# Altium PCB bms_v2.PcbDoc
Units mil, origin at the board's own origin, x right, y up, seen from the top; angles counter-clockwise.
Board outline 6000 x 4000 mil, 2 copper layers (Top Layer, Bottom Layer); 43 components, 47 nets, 140 pads, 0 vias.
Unrouted connection lines stored in the file: 2.
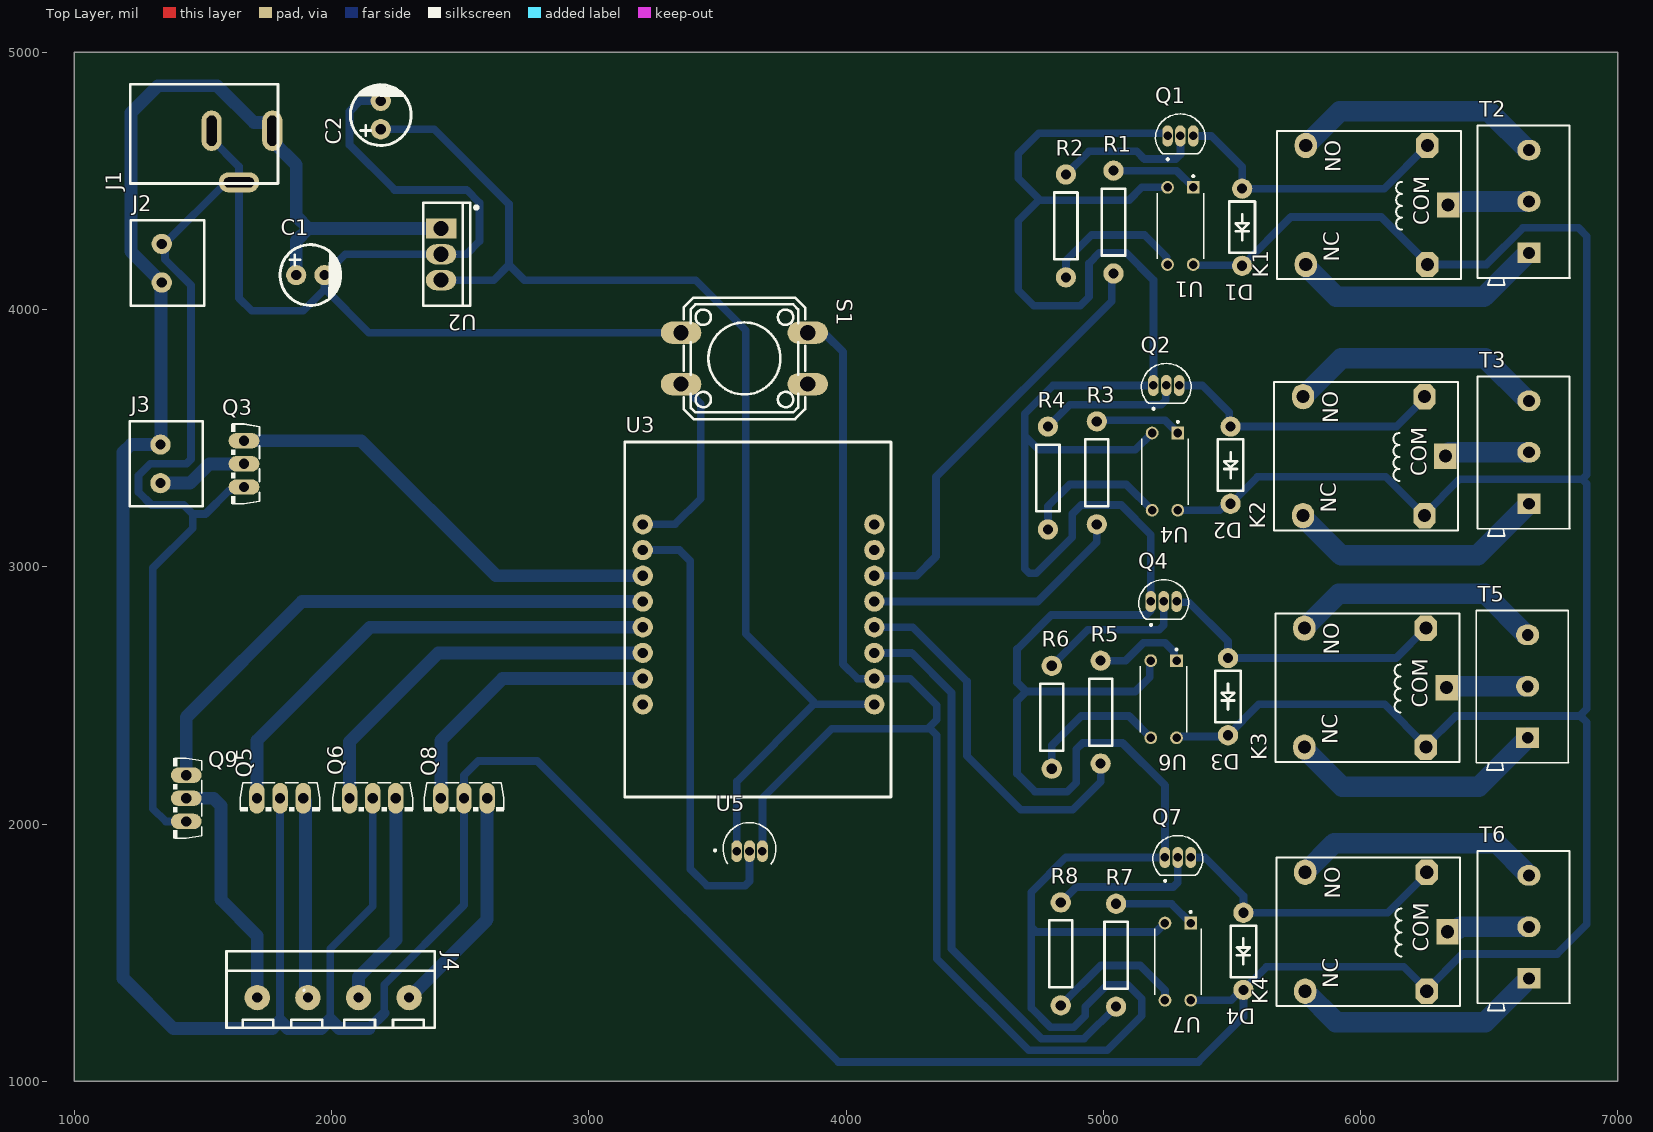
[diagram p0: Top Layer view]
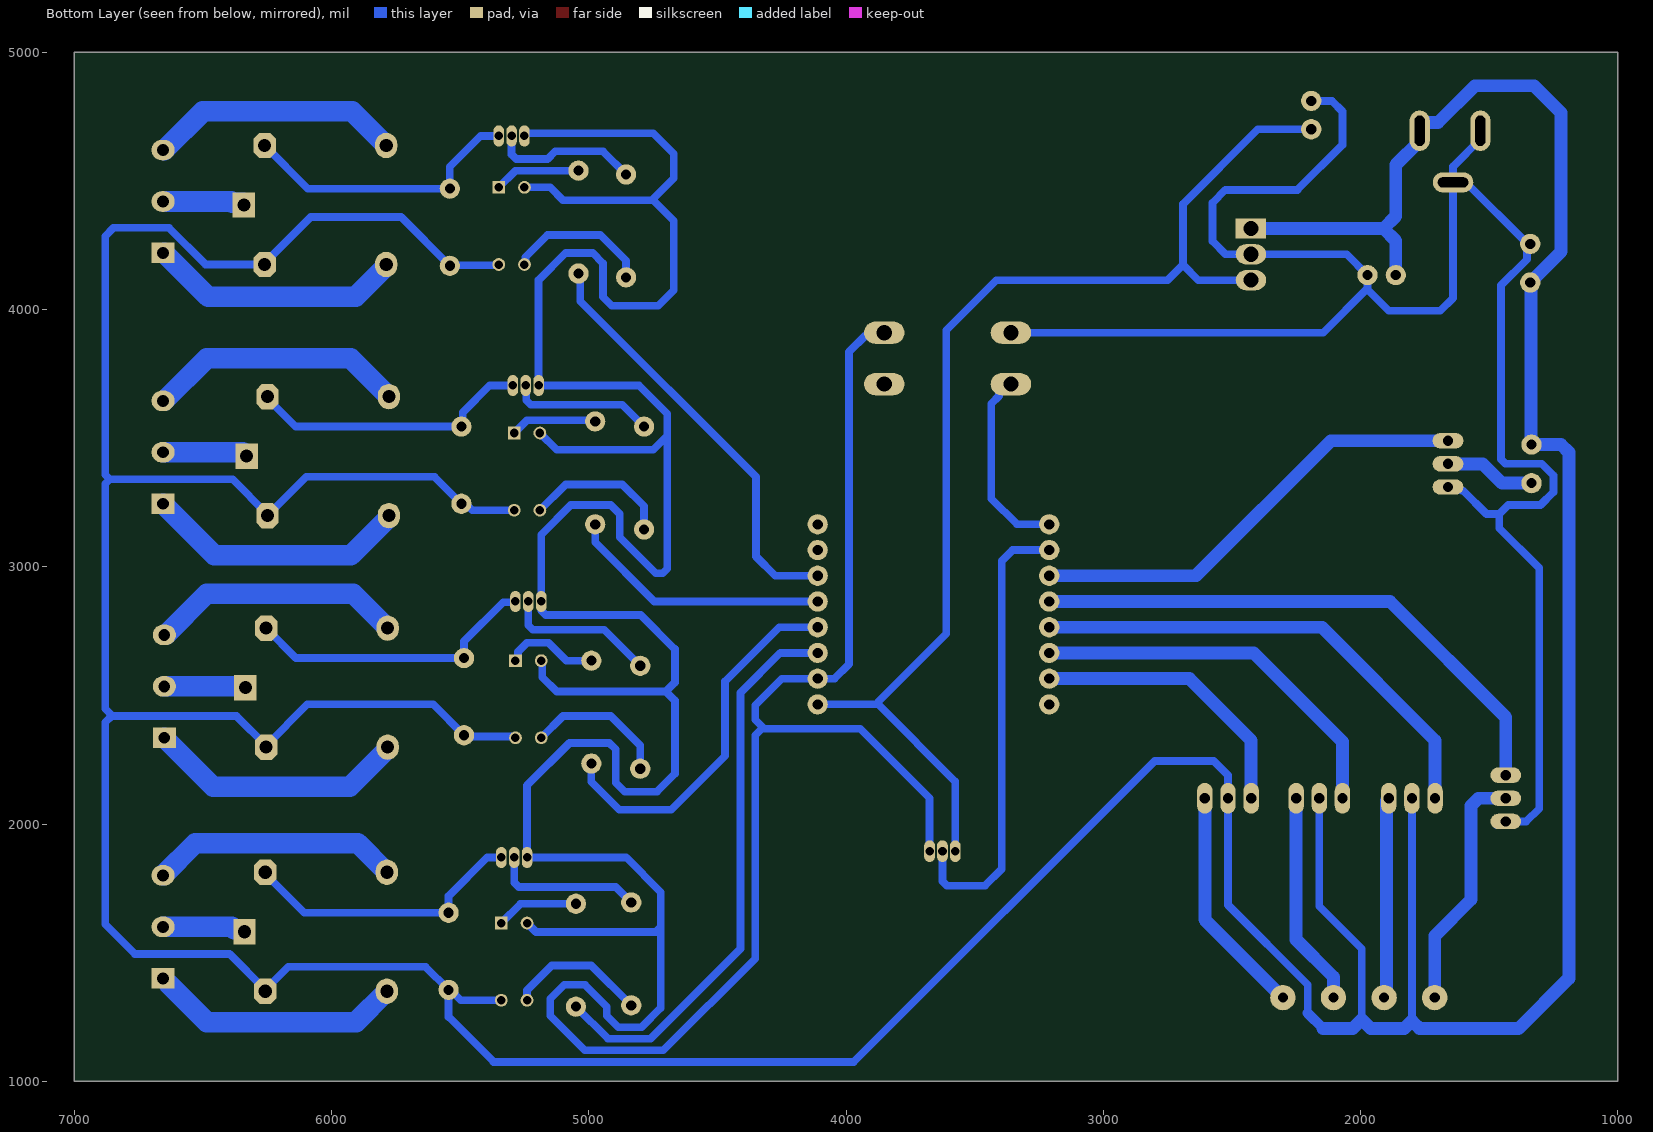
[diagram p1: Bottom Layer view, seen from below]

## Layer stack, top to bottom
Top Solder: solder mask 0.4, Solder Resist, Dk 3.5
Top Layer: signal copper 1.4
Dielectric 1: dielectric 12.6, FR-4, Dk 4.8
Bottom Layer: signal copper 1.4
Bottom Solder: solder mask 0.4, Solder Resist, Dk 3.5

## Board outline
1000,1000 7000,1000 7000,5000 1000,5000

## Design rules (kind name [scope] priority, off if disabled: settings)
Clearance [All] p1: gap=10 ignorepadtopadclearanceinfootprint=FALSE except(0: Arc-Hole Track-Hole SMDPad-Hole THPad-Hole Via-Hole Fill-Hole Poly-Hole Region-Hole Text-Hole)
PolygonConnect [All] p1: connectstyle=Relief reliefconductorwidth=10 reliefentries=4 polygonreliefangle="90 Angle" airgapwidth=10
RoutingVias [All] p1: holewidth=28 width=50 viastyle="Through Hole" minholewidth=28 minwidth=50 maxholewidth=28 maxwidth=50
SolderMaskExpansion [All] p1: expansion=4 istentingtop=FALSE
UnRoutedNet [All] p1: checkbadconnections=TRUE
Width [All] p1: maxlimit=80 minlimit=10 preferedwidth=25
29 further rules are at their usual default settings.

## Components (designator, comment, footprint, x,y, rotation, side; value= is the part's Value field where it differs from the comment)
C1 "100uF/16V" 100uF/16V 1917.64,4134.02 r0 top
C2 "100uF/16V" 100uF/16V 2191.32,4755.9 r90 top
D1 "1N4007" 1N4007 5540,4320 r180 top
D2 "1N4007" 1N4007 5495,3395 r180 top
D3 "1N4007" 1N4007 5485,2495 r180 top
D4 "1N4007" 1N4007 5545,1505 r180 top
J1 "VCC +12" JACK_P4 1504.39,4682.5 r180 top
J2 "15EDGVC-3.81-2P" 15EDGVC-3.81-2P 1360,4180 r0 top
J3 "15EDGVC-3.81-2P" 15EDGVC-3.81-2P 1355,3400 r0 top
J4 "BORNE-5.00-4P" BORNE-5.00-4P 1996.57,1356.4 r270 top
K1 "Relay 18.85x15.35x15.70" "Relay 18.85x15.35x15.70" 9211.97,-469.61 r90 top
K2 "Relay 18.85x15.35x15.70" "Relay 18.85x15.35x15.70" 9201.26,-1445.91 r90 top
K3 "Relay 18.85x15.35x15.70" "Relay 18.85x15.35x15.70" 9206.26,-2345.91 r90 top
K4 "Relay 18.85x15.35x15.70" "Relay 18.85x15.35x15.70" 9209.41,-3294.61 r90 top
Q1 "2N3904" TO92127P495H495-3 5300,4675 r0 top
Q2 "2N3904" TO92127P495H495-3 5245,3705 r0 top
Q3 "BD139" TO126AV 1609.91,3400 r90 top
Q4 "2N3904" TO92127P495H495-3 5235,2865 r0 top
Q5 "BD139" TO126AV 1799.99,2050 r180 top
Q6 "BD139" TO126AV 2159.99,2050 r180 top
Q7 "2N3904" TO92127P495H495-3 5290,1870 r0 top
Q8 "BD139" TO126AV 2514.99,2050 r180 top
Q9 "BD139" TO126AV 1385,2100 r90 top
R1 "220 ohm" RESISTOR_PTH_10mm 5040,4340 r90 top
R2 "510 ohm" RESISTOR_PTH_10mm 4855,4325 r90 top
R3 "220 ohm" RESISTOR_PTH_10mm 4975,3365 r90 top
R4 "510 ohm" RESISTOR_PTH_10mm 4785,3345 r90 top
R5 "220 ohm" RESISTOR_PTH_10mm 4990,2435 r90 top
R6 "510 ohm" RESISTOR_PTH_10mm 4800,2415 r90 top
R7 "220 ohm" RESISTOR_PTH_10mm 5050,1490 r90 top
R8 "510 ohm" RESISTOR_PTH_10mm 4835,1495 r90 top
S1 "PUSH_BUTTON_12X12" PUSH_BUTTON_12X12_BLUE 3605,3810 r0 top
T2 "3Pin_Terminal" 3Pin_Terminal 7805.24,1649.17 r90 top
T3 "3Pin_Terminal" 3Pin_Terminal 7805.24,674.17 r90 top
T5 "3Pin_Terminal" 3Pin_Terminal 7800.24,-235.83 r90 top
T6 "3Pin_Terminal" 3Pin_Terminal 7805.24,-1170.83 r90 top
U1 "PC817X3NSZ1B" DIP762W50P254L495H455Q4 5300,4325 r270 top
U2 "L7805" L7805_180 2447.2,4215 r270 top
U3 "Wemos mini d1" PCBComponent_1 3160,2140 r0 top
U4 "PC817X3NSZ1B" DIP762W50P254L495H455Q4 5240,3370 r270 top
U5 "LM35DZ/NOPB" TO92127P521H735-3 3625,1925 r0 top
U6 "PC817X3NSZ1B" DIP762W50P254L495H455Q4 5235,2485 r270 top
U7 "PC817X3NSZ1B" DIP762W50P254L495H455Q4 5290,1465 r270 top

## Footprints (in the part's own frame and the unit in brackets; to place one, negate y for a bottom-side part, rotate by r counter-clockwise, add the part's x,y. Pads: shape width x height; smd on the part's side, far side on the other; paste and mask are expansions set on the pad)
1N4007 [mm] "Rectifier Diode 1000V 1A DO-41"
  round 2 hole 1: 1(0,-3.81) 2(0,3.81)
  silkscreen extent -1.27,-2.54 1.27,2.54, body extent -1.35,-4.24 1.35,4.24, height 3.35
3Pin_Terminal [mil]
  rect 80x90 hole 46: 1(2570.83,1150.24)
  oval 80x90 hole 46: 2(2770.83,1150.24) 3(2970.83,1150.24)
  silkscreen extent 2446,990 3066,1350, body extent 2443,993 3066,1350, height 503
15EDGVC-3.81-2P [mm]
  round 2 hole 1 paste-2539.97: 1(-0.508,1.905) 2(-0.508,-1.905)
  silkscreen extent -3.56,-4.19 3.68,4.22, body extent -3.52,-4.21 3.68,4.21, height 9.2
100uF/16V [mm] "ELECTROLYTIC CAPACITOR 6mm"
  round 2 hole 1: 1(1.397,0) 2(-1.397,0)
  silkscreen extent -3,-3 3,3, body extent -3.14,-3.14 3.15,3.14, height 11
BORNE-5.00-4P [mm]
  round 2.5 hole 1: 1(0.798,7.754) 2(0.798,2.754) 3(0.798,-2.246) 4(0.798,-7.246)
  silkscreen extent -3.79,-10.29 3.79,10.29, body extent -3.82,-10.29 3.78,10.31, height 10.02
DIP762W50P254L495H455Q4 [mm]
  rect 1.26x1.26 / inner round 1.26 / far side rect 1.26x1.26 hole 0.84: 1(-3.81,1.27)
  round 1.26 hole 0.84: 2(-3.81,-1.27) 3(3.81,-1.27) 4(3.81,1.27)
  silkscreen extent -5.01,-2.3 3.25,2.3, body extent -3.94,-2.3 3.94,2.3, height 4.55
JACK_P4 [mm]
  oval 2x4 hole 1 slot 3 at 90 deg: 1(-6.747,-0.318) 2(-0.747,-0.318)
  oval 4x2 hole 1 slot 3 at 0 deg: 3(-3.446,4.783)
  silkscreen extent -7.3,-4.89 7.3,4.89, body extent -7.27,-4.92 7.23,4.88, height 11.38
L7805_180 [mm] "TO-220"
  rect 2x3 hole 1.5: 1(-2.54,-0.541)
  oval 2x3 hole 1.5: 2(0.01,-0.541) 3(2.56,-0.541)
  silkscreen extent -5.08,-2.32 5.08,3.03, body extent -5.1,-2.19 5.1,2.31, height 19.31
PCBComponent_1 [mm]
  round 2 hole 1: 3V3(1.27,8.255) 5V(24.13,8.255) A0(1.27,23.495) D0(1.27,20.955) D1(24.13,20.955) D2(24.13,18.415) D3(24.13,15.875) D4(24.13,13.335) D5(1.27,18.415) D6(1.27,15.875) D7(1.27,13.335) D8(1.27,10.795) GND(24.13,10.795) RST(1.27,26.035) RX(24.13,23.495) TX(24.13,26.035)
  silkscreen extent -0.51,-0.89 25.78,34.16, body extent -0.27,-0.59 25.53,33.86, height 7.9
PUSH_BUTTON_12X12_BLUE [mm]
  oval 4x2.2 hole 1.5: 1(-6.251,2.54) 1(6.251,2.54) 2(-6.251,-2.54) 2(6.251,-2.54)
  silkscreen extent -5.99,-6 5.99,6, body extent -6.77,-6.01 6.65,6, height 8.84
"Relay 18.85x15.35x15.70" [mm]
  rect 2.5x2.2 hole 1.3: 1(123.848,72.93)
  oval 2.5x2.2 hole 1.3: 2(117.973,86.98) 3(129.723,86.98)
  oct 2.5x2.2 hole 1.3: 4(117.973,74.98) 5(129.723,74.98)
  silkscreen extent 116.52,71.68 131.17,89.83, body extent 116.48,71.24 131.48,89.94, height 15.7
RESISTOR_PTH_10mm [mm]
  round 2 hole 1: 1(-5.08,0) 2(5.08,0)
  silkscreen extent -3.3,-1.14 3.3,1.14, body extent -5.33,-1.14 5.33,1.15, height 2.4
TO126AV [mil]
  oval 60x120 hole 40: B(90,-50) C(0,-50) E(-90,-50)
  silkscreen extent -155,-110 155,0, body extent -150,-60 150,45, height 520
TO92127P495H495-3 [mm]
  oval 1.04x2.08 hole 0.84: 1(-1.27,0) 2(0,0) 3(1.27,0)
  silkscreen extent -2.48,-2.4 2.48,2.16, body extent -2.28,-1.55 2.28,2.28, height 20.44
TO92127P521H735-3 [mm]
  oval 1.07x2.14 hole 0.85: 1(-1.27,-0.775) 2(0,-0.775) 3(1.27,-0.775)
  silkscreen extent -3.5,-2.08 2.6,2.04, body extent -2.4,-1.53 2.4,2.4, height 7.74

## Part data
C1 C2: "Electrolytic Capacitor 100uF/16V"
D1 D2 D3 D4: "Rectifier Diode 1000V 1A DO-41", JLCPCB PN=C3033995, ComponentLink1Description=Datasheet, ComponentLink1URL=https://www.mouser.com/datasheet/2/849/1n4001-2577232.pdf, Digikey PN=4617-1N4007TB-ND, Mouser PN=637-1N4007
J1: library part JACK_P4, "9V Battery Connector Jack P4."
J2 J3: "Female Connector 15EDGVC-2P, pitch 3.81mm.", JLCPCB PN=C8396
J4: "Borne 4 Vias, Pitch 5mm.", JLCPCB PN=C2915641
Q1 Q2 Q4 Q7: "TRANS NPN 40V 200MA TO92-3", Package="TO-226-3 Rectron", Availability="In Stock", Check_prices=https://www.snapeda.com/parts/2N3904/Rectron/view-part/?ref=eda, MF=Rectron, MP=2N3904, Price=None, Purchase-URL=https://pricing.snapeda.com/search/part/2N3904/?ref=eda, SnapEDA_Link=https://www.snapeda.com/parts/2N3904/Rectron/view-part/?ref=snap
Q3 Q5 Q6 Q8 Q9: "Bipolar (BJT) Transistor NPN 80 V 1.5 A - 1.25 W Through Hole TO-126-3", Package="TO-126 STMicroelectronics", Check_prices=https://www.snapeda.com/parts/BD139/Onsemi/view-part/?ref=eda, MF=ON, MP=BD139, SnapEDA_Link=https://www.snapeda.com/parts/BD139/Onsemi/view-part/?ref=snap
R1 R2 R3 R4 R5 R6 R7 R8: library part RESISTOR_10mm, "Generic Resistor 10mm."
S1: "Push Button Tactile Switch PTH 4 Pins 12x12mm.", JLCPCB PN=C84931, Mouser PN=992-BUTT-12-5
U1 U4 U6 U7: "Optoisolator Transistor Output - 1 Channel 4-DIP", Package="DIP-4 Sharp Microelectronics", Availability="In Stock", Check_prices=https://www.snapeda.com/parts/PC817X3NSZ1B/Sharp+Microelectronics/view-part/?ref=eda, MF="Sharp Microelectronics", MP=PC817X3NSZ1B, Price=None, Purchase-URL=https://pricing.snapeda.com/search/part/PC817X3NSZ1B/?ref=eda, SnapEDA_Link=https://www.snapeda.com/parts/PC817X3NSZ1B/Sharp+Microelectronics/view-part/?ref=snap
U2: "IC REG LINEAR 5V 1.5A TO220AB", JLCPCB PN PTH=C347289, JLCPCB PN SMD=C15077, ComponentLink1Description=Datasheet, ComponentLink1URL=https://www.mouser.com/datasheet/2/389/l78-1849632.pdf, Digikey PN=497-1443-5-ND, Mouser PN=511-L7805CV
U3: library part "wemos mini d1"
U5: "Temperature Sensor Analog, Local 0Â°C ~ 100Â°C 10mV/Â°C TO-92-3", Package="E-PKG AXIAL-LEADED-2 ON Semiconductor", Availability="In Stock", Check_prices=https://www.snapeda.com/parts/LM35DZ/Texas+Instruments/view-part/?ref=eda, MF="Texas Instruments", MP=LM35DZ, Price=None, Purchase-URL=https://pricing.snapeda.com/search/part/LM35DZ/?ref=eda, SnapEDA_Link=https://www.snapeda.com/parts/LM35DZ/Texas+Instruments/view-part/?ref=snap

## Nets (pads, with @x,y where several pads share a name; then routed paths per layer and width w, separated by ;. In a path a pad name is that pad's centre, name@x,y a point inside that pad or via, vN(x,y) a via of type N, cw(c..) or ccw(c..) an arc to the next point about the centre after c; other vN are vias at no path point)
+5: C2.2 U2.3 U3.5V U5.1 | length 4663.8
  Bottom Layer w30: C2.2 2399.1,4700.9 2690,4410 2690,4174.21 ; U2.3 2630,4114.21 2690,4174.21 ; U5.1 3575,2165 3875,2465 ; U3.5V 3875,2465 ; 2690,4174.21 2750,4114.21 3415.79,4114.21 3610,3920 3610,2740 3875,2475 3875,2465
+12: C1.2 D1.2 D2.2 D3.2 D4.2 J1.1 J2.2 J3.1 K1.4 K2.4 K3.4 K4.4 Q5.C Q6.C Q8.C U1.4 U2.1 U4.4 U6.4 U7.4 | length 22807.6
  Bottom Layer w30: J3.1 J3.1@1337.5,3477.5 ; J2.2@1337.5,4102.5 J2.2 ; J1.1@1770,4655.63 J1.1 J1.1@1770,4734.37 ; 1795.01,1235.01 1799.99,1235.01 Q5.C ; 1862.64,4362.36 1862.64,4365 ; 1995,1240 1995,1515 2159.99,1679.99 Q6.C ; 2205,1265 2205,1375 2514.99,1684.99 2514.99,2189.99 2570,2245 2800,2245 3970,1075 5370,1075 5545,1250 D4.2 ; U6.4 5290,2340 5480,2340 D3.2 5605,2465 6093.9,2465 K3.4@6254.29,2304.61 ; U4.4 5452.75,3220 5477.75,3245 D2.2 5600,3350 6097.99,3350 K2.4 6249.29,3204.61 6384.69,3340 6862.43,3340 ; U7.4 5497.5,1315 5537.5,1355 D4.2 ; U1.4 5352.5,4172.5 5537.5,4172.5 D1.2 5730,4360 6080.91,4360 ; 6083.03,4357.88 6260,4180.91 K1.4 6489.64,4175 6632.22,4317.57 6847.43,4317.57 6880,4285 6880,3357.57 6862.43,3340 ; K3.4 K3.4@6254.29,2304.61 ; K4.4 K4.4@6257.44,1355.91 ; D4.2 5635,1445 6168.35,1445 K4.4@6257.44,1355.91 ; K3.4@6254.29,2304.61 6369.69,2420 6852.43,2420 ; K4.4@6257.44,1355.91 6396.53,1495 6765,1495 6880,1610 6880,2395 6855,2420 6852.43,2420 ; 6852.43,2420 6880,2447.57 6880,3322.43 6862.43,3340
  Bottom Layer w40: 2145,1205 2205,1265
  Bottom Layer w50: J3.1 1220,3475 1190,3445 1190,1400 1385,1205 1769.98,1205 1797.5,1232.52 ; J3.1@1337.5,3477.5 J2.2@1337.5,4102.5 ; J2.2 1220,4225 1220,4765 1325,4870 1555,4870 1698.13,4726.87 J1.1@1740.56,4726.87 ; J1.1@1770,4655.63 1862.64,4562.99 1862.64,4365 ; 1799.99,1235.01 1830,1205 1960,1205 1995,1240 2030,1205 2145,1205 ; C1.2 1862.64,4267.64 1910,4315 ; 1862.64,4362.36 1910,4315 ; U2.1 1910,4315
channel1: R1.1 U3.D1 | length 1656.9
  Bottom Layer w30: U3.D1 4275,2965 4350,3040 4350,3350 5032.84,4032.84 5032.84,4132.84 R1.1
channel2: R3.1 U3.D2 | length 1030.3
  Bottom Layer w30: U3.D2 4745,2865 4975,3095 R3.1
channel3: R5.1 U3.D3 | length 1460.2
  Bottom Layer w30: U3.D3 4260,2765 4470,2555 4470,2265 4680,2055 4881.21,2055 4990,2163.79 R5.1
channel4: R7.1 U3.D4 | length 2196
  Bottom Layer w30: U3.D4 4255,2665 4410,2510 4410,1515 4760,1165 4925,1165 R7.1
Fan: Q3.B U3.D0 | length 1767.6
  Bottom Layer w50: Q3.B 2115,3490 2640,2965 U3.D0
GND: C1.1 C2.1 J1.2 J1.3 J2.1 Q1.1 Q2.1 Q3.E Q4.1 Q7.1 Q9.E S1.1 U1.2 U2.2 U3.GND U4.2 U5.3 U6.2 U7.2 | length 23034.7
  Bottom Layer w30: J2.1 1352.2,4242.8 1352.2,4195.56 1453.79,4093.97 1453.79,3417.57 1436.21,3400 1295,3400 1250,3355 1250,3290 1300,3240 1425,3240 1460,3205 ; J2.1@1350.75,4255 1589.96,4494.21 J1.3 ; Q9.E 1355,2010 1305,2060 1305,2995 1460,3150 1460,3205 ; Q9.E@1456.88,2010 Q9.E@1470.74,1996.14 ; J1.2 1533.78,4662.38 1640.08,4556.08 J1.3 ; Q3.E 1621.79,3310 1606.79,3295 1600,3295 1510,3205 1460,3205 ; 1971.17,4076.17 1890,3995 1690,3995 1640.08,4044.92 J1.3 ; C2.1 2110.9,4810.9 2070,4770 2070,4640 2245,4465 2525,4465 2575,4415 2575,4265 2524.61,4214.61 2053.23,4214.61 C1.1 1972.64,4082.36 2145,3910 S1.1@3358.9,3910 ; U5.3 3675,2100 3945,2370 4318.22,2370 ; S1.1@3851.1,3910 3861.93,3899.17 3924.27,3899.17 3988.3,3835.14 3988.3,2621.7 4045,2565 U3.GND 4250,2565 4353.22,2461.78 4353.22,2405 4318.22,2370 ; U6.2 5181.25,2631.25 5181.25,2571.25 5125,2515 4700,2515 ; Q4.1@5185,2830 5167.49,2812.49 4797.49,2812.49 4665,2680 4665,2550 4700,2515 ; Q4.1 5185,3125 5070,3240 4915,3240 4880,3205 4880,3115 4740,2975 4712.57,2975 4695,2992.57 4695,3510 ; U4.2 5125,3455 4750,3455 4695,3510 ; U7.2 5205,1580 4740,1580 4720,1600 ; U1.2 5150,4475 5100,4425 4755,4425 ; Q1.1 5250,4679.94 5244.94,4685 4750,4685 4670,4605 4670,4510 4755,4425 ; 4318.22,2370 4328.22,2370 4353.22,2345 4353.22,1476.78 4710,1120 5015,1120 5150,1255 5150,1320 5095,1375 5015,1375 4930,1290 4930,1255 4885,1210 4795,1210 4720,1285 4720,1600 ; 4695,3510 4695,3595 4805,3705 Q2.1 5195,4115 5090,4220 4985,4220 4945,4180 4945,4050 4910,4015 4730,4015 4670,4075 4670,4345 4750,4425 4755,4425 ; 4700,2515 4665,2480 4665,2195 4735,2125 4860,2125 4895,2160 4895,2290 4920,2315 5075,2315 5240,2150 Q7.1 4855,1870 4720,1735 4720,1600
NetD1_1: D1.1 K1.5 Q1.3 | length 1114.1
  Bottom Layer w30: Q1.3 5420,4675 5540,4555 D1.1 6092.4,4470 K1.5
NetD2_1: D2.1 K2.5 Q2.3 | length 1101.5
  Bottom Layer w30: Q2.3 5385,3705 5490.34,3599.66 5490.34,3549.66 D2.1 6138.9,3545 6249.29,3655.39 K2.5
NetD3_1: D3.1 K3.5 Q4.3 | length 1146.7
  Bottom Layer w30: Q4.3 5287.9,2862.1 5332.9,2862.1 5485,2710 D3.1 6137.99,2645 K3.5
NetD4_1: D4.1 K4.5 Q7.3 | length 1113.3
  Bottom Layer w30: Q7.3 5395,1870 5545,1720 D4.1 6105.75,1655 6257.44,1806.69 K4.5
NetJ3_2: J3.2 Q3.C | length 356
  Bottom Layer w50: J3.2 1449.5,3325 1524.5,3400 Q3.C
NetJ4_1: J4.1 Q8.E | length 900.6
  Bottom Layer w50: J4.1 2604.99,1628.15 Q8.E
NetJ4_2: J4.2 Q6.E | length 835.1
  Bottom Layer w50: J4.2 2104.99,1404.99 2249.99,1549.99 Q6.E
NetJ4_3: J4.3 Q5.E | length 782.5
  Bottom Layer w30: Q5.E Q5.E@1898.6,2091.39 ; J4.3@1898.6,1334.54 J4.3
  Bottom Layer w50: J4.3@1898.6,1334.54 Q5.E@1898.6,2091.39
NetJ4_4: J4.4 Q9.C | length 951.4
  Bottom Layer w50: Q9.C 1540.71,2100 1570,2070.71 1570,1706.31 1711.29,1565.02 J4.4
NetK1_1: K1.1 T2.2 | length 318.4
  Bottom Layer w80: K1.1 6340.71,4412.21 6344.02,4415.51 6385.87,4415.51 6390.36,4420 T2.2@6650,4420
NetK1_2: K1.2 T2.1 | length 993.1
  Bottom Layer w30: K1.2@5787.56,4169.09 K1.2 ; T2.1@6650,4220 T2.1
  Bottom Layer w80: K1.2@5787.56,4169.09 5906.65,4050 6480,4050 T2.1@6650,4220
NetK1_3: K1.3 T2.3 | length 979.4
  Bottom Layer w80: K1.3 5919.96,4770 6500,4770 T2.3@6650,4620
NetK2_1: K2.1 T3.2 | length 331.2
  Bottom Layer w30: K2.1 K2.1@6345,3445
  Bottom Layer w80: K2.1@6345,3445 T3.2
NetK2_2: K2.2 T3.1 | length 1028.1
  Bottom Layer w30: K2.2@5776.85,3192.8 K2.2
  Bottom Layer w80: K2.2@5776.85,3192.8 5924.65,3045 6455,3045 T3.1
NetK2_3: K2.3 T3.3 | length 1008.1
  Bottom Layer w30: T3.3@6650,3645 T3.3
  Bottom Layer w80: K2.3 5925.55,3810 6485,3810 T3.3@6650,3645
NetK3_1: K3.1 T5.2 | length 317.1
  Bottom Layer w30: K3.1 K3.1@6340,2535
  Bottom Layer w80: K3.1@6340,2535 T5.2
NetK3_2: K3.2 T5.1 | length 1014
  Bottom Layer w30: K3.2@5781.85,2292.8 K3.2
  Bottom Layer w80: K3.2@5781.85,2292.8 5929.65,2145 6460,2145 T5.1
NetK3_3: K3.3 T5.3 | length 992.2
  Bottom Layer w30: K3.3 K3.3@5783.41,2762.85 ; T5.3@6645,2735 T5.3
  Bottom Layer w80: K3.3@5783.41,2762.85 5783.41,2766.97 5784.91,2768.47 5789.02,2768.47 5915.55,2895 6485,2895 T5.3@6645,2735
NetK4_1: K4.1 T6.2 | length 328.1
  Bottom Layer w80: K4.1 6338.15,1587.21 6341.46,1590.51 6378.83,1590.51 6388.32,1600 T6.2
NetK4_2: K4.2 T6.1 | length 993.1
  Bottom Layer w30: T6.1@6630,1375 6630,1380 6650,1400 T6.1
  Bottom Layer w80: K4.2 5905,1230 6485,1230 T6.1@6630,1375
NetK4_3: K4.3 T6.3 | length 968.3
  Bottom Layer w80: K4.3 5897.4,1925 6530,1925 T6.3
NetQ1_2: Q1.2 R2.2 | length 574.4
  Bottom Layer w30: R2.2 4945,4615 5130,4615 5160,4585 5282.43,4585 5300,4602.57 Q1.2
NetQ2_2: Q2.2 R4.2 | length 558.7
  Bottom Layer w30: R4.2 4870,3630 5225.33,3630 5242.91,3647.57 5242.91,3702.91 Q2.2
NetQ4_2: Q4.2 R6.2 | length 557.7
  Bottom Layer w30: R6.2 4940,2755 5217.43,2755 5235,2772.57 Q4.2@5235,2830
NetQ7_2: Q7.2 R8.2 | length 584.6
  Bottom Layer w30: R8.2 4895,1755 5272.43,1755 5290,1772.57 Q7.2
NetR1_2: R1.2 U1.1 | length 336.9
  Bottom Layer w30: R1.2 5285,4540 U1.1
NetR2_1: R2.1 U1.3 | length 563.7
  Bottom Layer w30: R2.1 4855,4190 4955,4290 5160,4290 5246.25,4203.75 5246.25,4178.75 U1.3
NetR3_2: R3.2 U4.1 | length 337.6
  Bottom Layer w30: R3.2 4979.8,3569.8 5240.2,3569.8 U4.1
NetR4_1: R4.1 U4.3 | length 571.6
  Bottom Layer w30: R4.1 4785,3235 4870,3320 5090,3320 U4.3
NetR5_2: R5.2 U6.1 | length 367.6
  Bottom Layer w30: R5.2 5086.59,2635 5156.59,2705 5240,2705 5275.2,2669.8 5275.2,2644.8 U6.1
NetR6_1: R6.1 U6.3 | length 557.8
  Bottom Layer w30: R6.1 4800,2305 4915,2420 5100,2420 U6.3
NetR7_2: R7.2 U7.1 | length 321.1
  Bottom Layer w30: R7.2 5265,1690 U7.1
NetR8_1: R8.1 U7.3 | length 548.2
  Bottom Layer w30: R8.1 4990,1450 5144.07,1450 5240.18,1353.89 5240.18,1315.18 U7.3
RGBBlue: Q8.B U3.D8 | length 1109.4
  Bottom Layer w50: Q8.B 2424.99,2324.99 2665,2565 U3.D8
RGBControl: Q9.B U3.D5 | length 2186.4
  Bottom Layer w50: Q9.B 1435,2415 1885,2865 U3.D5
RGBGreen: Q6.B U3.D7 | length 1502.9
  Bottom Layer w50: Q6.B 2069.99,2319.99 2415,2665 U3.D7
RGBRed: Q5.B U3.D6 | length 1907.3
  Bottom Layer w50: Q5.B 1709.99,2324.99 2150,2765 U3.D6
RST: S1.2 U3.RST | length 754.7
  Bottom Layer w30: U3.RST 3335,3165 3435,3265 3435,3633.9 3405.17,3663.73 3405.17,3683.85 3379.01,3710 S1.2@3358.9,3710
Sensor: U3.A0 U5.2 | length 1787.4
  Bottom Layer w30: U3.A0@3214.37,3060.63 U3.A0 3352.43,3065 3395,3022.43 3395,1825 3460,1760 3607.43,1760 3625,1777.57 U5.2
pads on no net: U3.3V3 U3.RX U3.TX

## Text inside footprints (layer, text, board x,y; h text height)
K1: Top Overlay "COM" at 6268.13,4328.3 h59.06 r90; Top Overlay "NO" at 5924.13,4534.3 h59.06 r90; Top Overlay "NC" at 5917.13,4186.3 h59.06 r90
K2: Top Overlay "COM" at 6257.43,3352 h59.06 r90; Top Overlay "NO" at 5913.43,3558 h59.06 r90; Top Overlay "NC" at 5906.43,3210 h59.06 r90
K3: Top Overlay "COM" at 6262.43,2452 h59.06 r90; Top Overlay "NO" at 5918.43,2658 h59.06 r90; Top Overlay "NC" at 5911.43,2310 h59.06 r90
K4: Top Overlay "COM" at 6265.57,1503.3 h59.06 r90; Top Overlay "NO" at 5921.57,1709.3 h59.06 r90; Top Overlay "NC" at 5914.57,1361.3 h59.06 r90